# Altium PCB PCB.PcbDoc
Units mm, origin at the board's own origin, x right, y up, seen from the top; angles counter-clockwise.
Board outline 119.38 x 63.37 mm, 2 copper layers (Top Layer, Bottom Layer); 34 components, 32 nets, 125 pads, 5 vias.
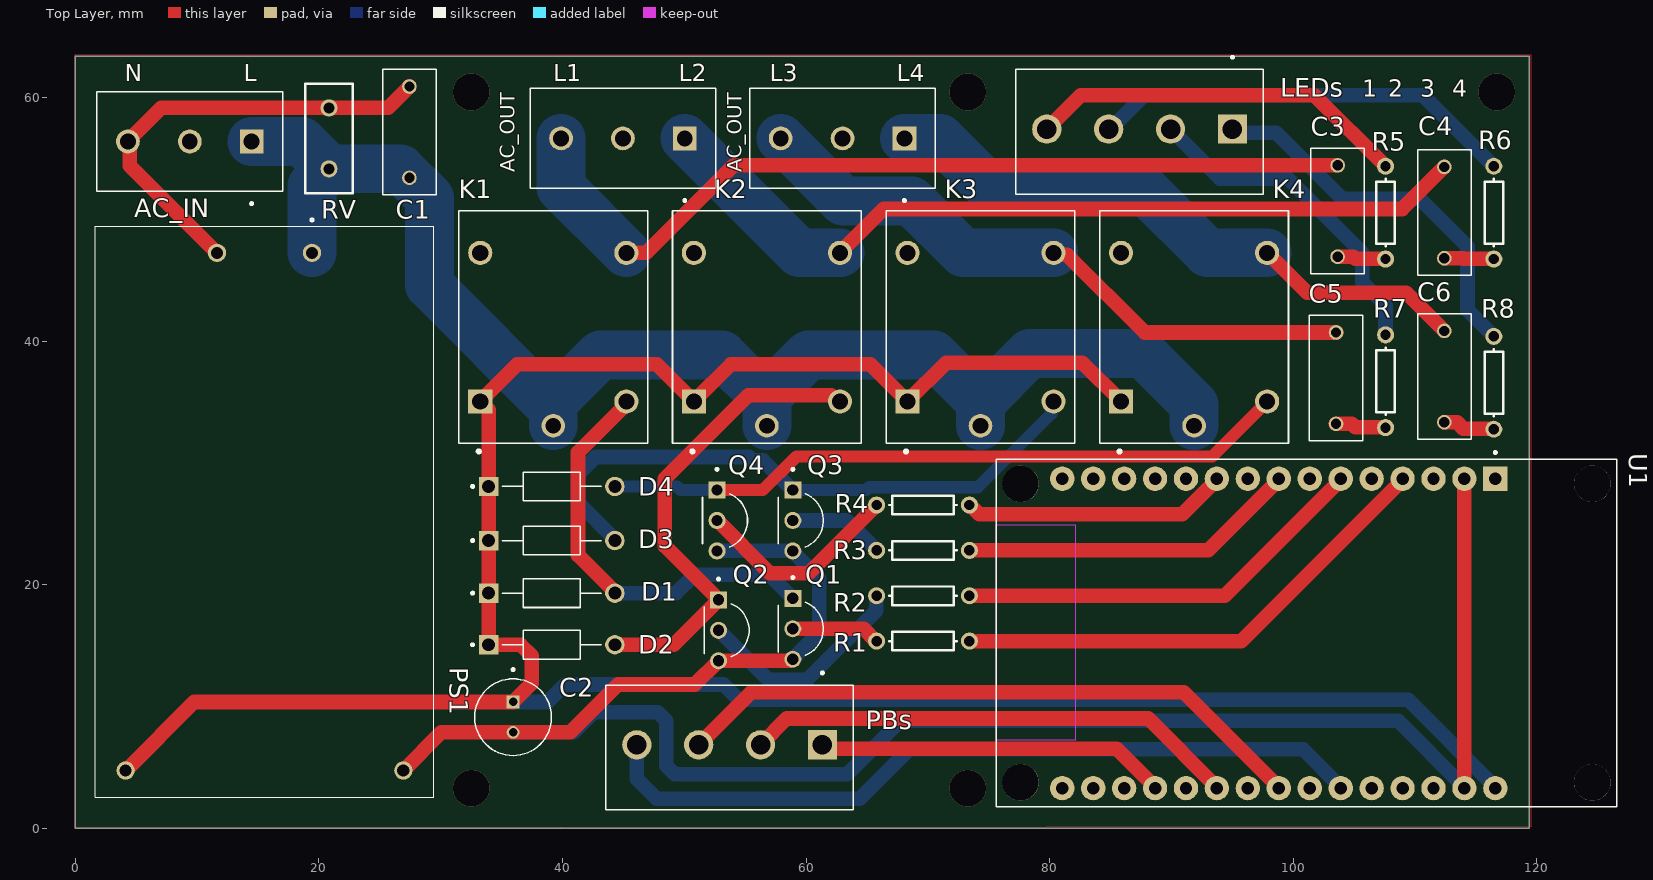
[diagram p0: Top Layer view]
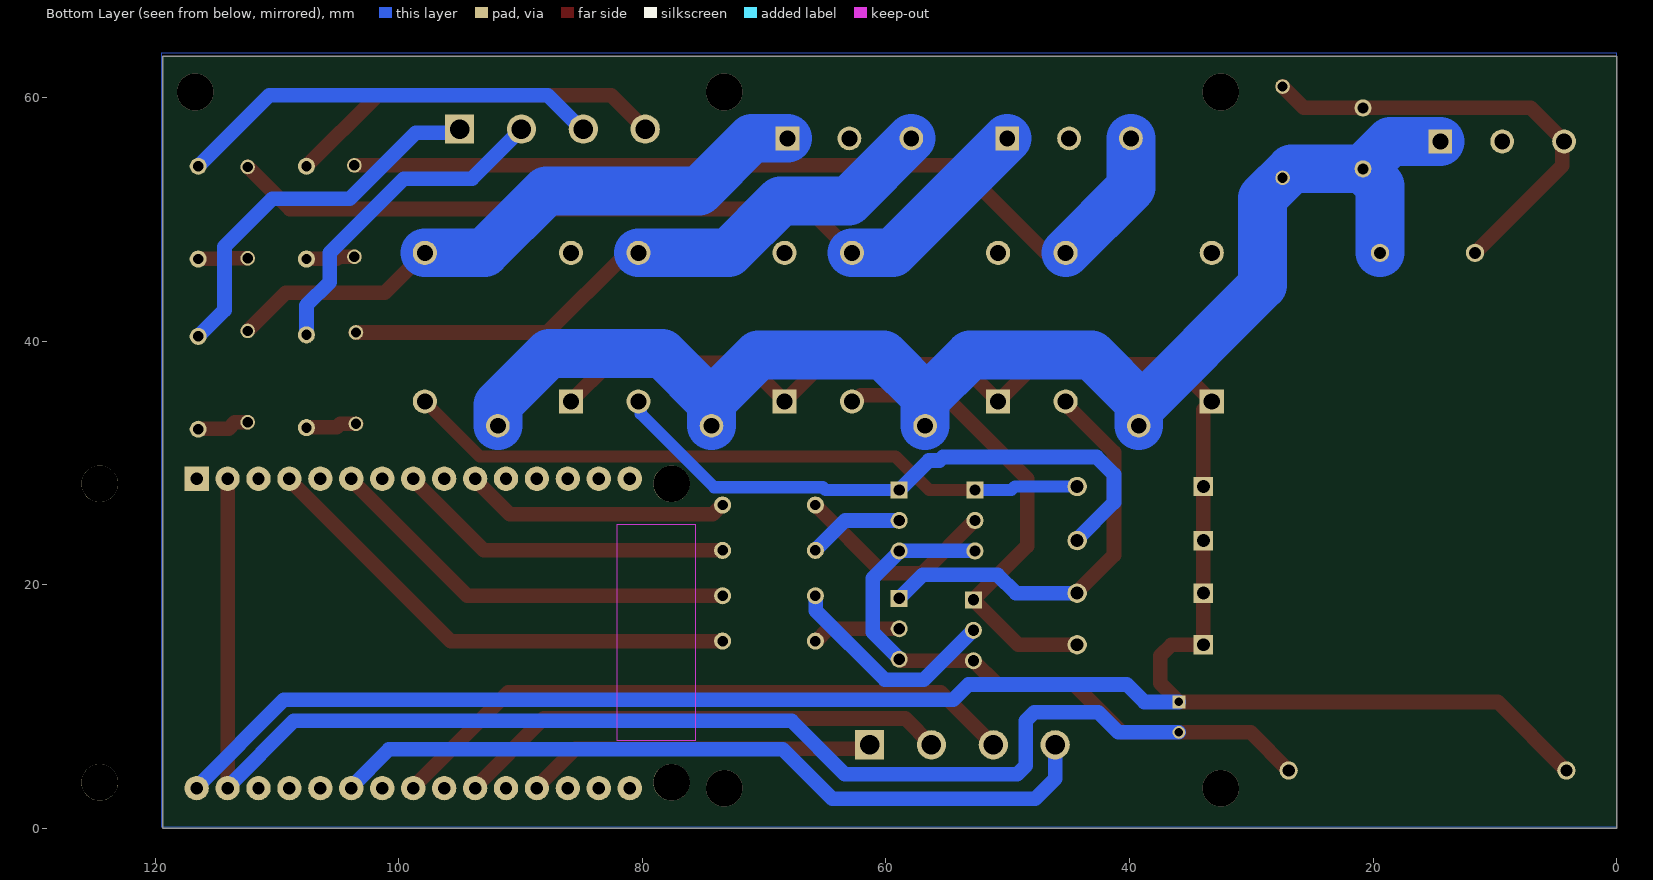
[diagram p1: Bottom Layer view, seen from below]

## Layer stack, top to bottom
Top Solder: solder mask 0.0102, Solder Resist, Dk 3.5
Top Layer: signal copper 0.0356
Dielectric 1: dielectric 0.32, FR-4, Dk 4.8
Bottom Layer: signal copper 0.0356
Bottom Solder: solder mask 0.0102, Solder Resist, Dk 3.5

## Board outline
0,0 119.38,0 119.38,63.373 0,63.373

## Design rules (kind name [scope] priority, off if disabled: settings)
Clearance Clearance_1 [InNamedPolygon('NONET_L02_P000') or InNamedPolygon('NONET_L01_P001')] p1: gap=0.254 ignorepadtopadclearanceinfootprint=FALSE except(0: Arc-Hole Track-Hole SMDPad-Hole THPad-Hole Via-Hole Fill-Hole Poly-Hole Region-Hole Text-Hole; 0.1: Via-Fill Via-Poly Via-Region; 1: Arc-Fill Arc-Poly Arc-Region Track-Fill Track-Poly Track-Region; 1.5: SMDPad-Fill SMDPad-Poly SMDPad-Region THPad-Fill THPad-Poly THPad-Region; 2: Fill-Fill Fill-Poly Fill-Region Poly-Poly Poly-Region Region-Region)
Clearance [All] p2: gap=0.254 ignorepadtopadclearanceinfootprint=FALSE except(0: Arc-Hole Track-Hole SMDPad-Hole THPad-Hole Via-Hole Fill-Hole Poly-Hole Region-Hole Text-Hole)
PolygonConnect [All] p1: connectstyle=Relief reliefconductorwidth=0.254 reliefentries=4 polygonreliefangle="90 Angle" airgapwidth=0.254
RoutingVias [All] p1: holewidth=0.711 width=1.27 viastyle="Through Hole" minholewidth=0.711 minwidth=1.27 maxholewidth=0.711 maxwidth=1.27
SolderMaskExpansion [All] p1: expansion=0.102 istentingtop=FALSE
Width Width_1 [InNet('AC_L') or InNet('AC_OUT_1') or InNet('AC_OUT_2') or InNet('AC_OUT_2') or InNet('AC_OUT_3') or InNet('AC_OUT_4')] p1: maxlimit=7 minlimit=1.2 preferedwidth=5
Width [All] p2: maxlimit=1.2 minlimit=0.8 preferedwidth=1
30 further rules are at their usual default settings.

## Classes and differential pairs
component class "main schem": AC_IN AC_OUT C1 C2 C3 C4 C5 C6 D1 D2 D3 D4 K1 K2 K4 LEDs PBs PS1 Q1 Q2 Q3 Q4 R1 R2 R3 R4 R5 R6 R7 R8 RV U1

## Components (designator, comment, footprint, x,y, rotation, side; value= is the part's Value field where it differs from the comment)
AC_IN "TB006-508-03BE" CUI_TB006-508-03BE 14.478,56.388 r180 top
AC_OUT "TB006-508-03BE" CUI_TB006-508-03BE 68.072,56.642 r180 top (schematic designator AC_L_OUT_2)
AC_OUT "TB006-508-03BE" CUI_TB006-508-03BE 50.038,56.642 r180 top (schematic designator AC_L_OUT_1)
C1 "ECQE4123KFW" CAPRR750W60L1030T440H1250 27.432,57.15 r90 top
C2 "25YXG220MEFC6.3X11" CAPPRD250W50D630H1250 35.941,9.124 r270 top
C3 "ECQE4123KFW" CAPRR750W60L1030T440H1250 103.632,50.673 r90 top
C4 "ECQE4123KFW" CAPRR750W60L1030T440H1250 112.395,50.546 r90 top
C5 "ECQE4123KFW" CAPRR750W60L1030T440H1250 103.505,36.957 r90 top
C6 "ECQE4123KFW" CAPRR750W60L1030T440H1250 112.395,37.084 r90 top
D1 "1N5818G" DIOAD1036W78L470D235 39.116,19.304 r0 top
D2 "1N5818G" DIOAD1036W78L470D235 39.116,15.071 r0 top
D3 "1N5818G" DIOAD1036W78L470D235 39.116,23.622 r0 top
D4 "1N5818G" DIOAD1036W78L470D235 39.116,28.067 r0 top
K1 "SRD-05VDC-SL-C" RELAY_SRD-05VDC-SL-C 39.243,41.148 r90 top
K2 "SRD-05VDC-SL-C" RELAY_SRD-05VDC-SL-C 56.779,41.148 r90 top
K3 "SRD-05VDC-SL-C" RELAY_SRD-05VDC-SL-C 74.316,41.148 r90 top
K4 "SRD-05VDC-SL-C" RELAY_SRD-05VDC-SL-C 91.852,41.148 r90 top
LEDs "TB007-508-04BE" CUI_TB007-508-04BE 94.996,57.404 r180 top
PBs "TB007-508-04BE" CUI_TB007-508-04BE 61.341,6.858 r180 top
PS1 "HLK-10M05" HLK10M05 19.431,47.244 r270 top
Q1 "BC337" TO92250P510H770-3 59.563,16.383 r270 top
Q2 "BC337" TO92250P510H770-3 53.467,16.256 r270 top
Q3 "BC337" TO92250P510H770-3 59.563,25.273 r270 top
Q4 "BC337" TO92250P510H770-3 53.34,25.273 r270 top
R1 "Res1" AXIAL-0.3 69.596,15.367 r180 top value=1K
R2 "Res1" AXIAL-0.3 69.596,19.092 r180 top value=1K
R3 "Res1" AXIAL-0.3 69.596,22.818 r180 top value=1K
R4 "Res1" AXIAL-0.3 69.596,26.543 r180 top value=1K
R5 "Res1" AXIAL-0.3 107.569,50.546 r90 top value=1K
R6 "Res1" AXIAL-0.3 116.459,50.546 r90 top value=1K
R7 "Res1" AXIAL-0.3 107.569,36.703 r90 top value=1K
R8 "Res1" AXIAL-0.3 116.459,36.576 r90 top value=1K
RV "MOV-07D470K" MOV-07DXXXK(3.9T) 20.828,56.642 r90 top
U1 "ESP32-DEVKIT-V1" ESP32-DEVKIT-V1 124.546,28.282 r270 top

## Footprints (in the part's own frame and the unit in brackets; to place one, negate y for a bottom-side part, rotate by r counter-clockwise, add the part's x,y. Pads: shape width x height; smd on the part's side, far side on the other; paste and mask are expansions set on the pad)
AXIAL-0.3 [mm] "Axial Device, Thru-Hole; 2 Leads; 0.3 in Pin Spacing"
  round 1.4 hole 0.85: 1(-3.81,0) 2(3.81,0)
  silkscreen extent -2.77,-0.76 2.77,0.76
CAPPRD250W50D630H1250 [mm]
  round 1.05 hole 0.7: N(1.25,0)
  rect 1.05x1.05 hole 0.7: P(-1.25,0)
  silkscreen extent -4,-3.15 3.15,3.15
CAPRR750W60L1030T440H1250 [mm]
  round 1.2 hole 0.85: 1(-3.75,0) 2(3.75,0)
  silkscreen extent -5.15,-2.2 5.15,2.2
CUI_TB006-508-03BE [mm]
  rect 1.95x1.95 / inner round 1.95 / far side rect 1.95x1.95 hole 1.3: 1(0,0)
  round 1.95 hole 1.3: 2(5.08,0) 3(10.16,0)
  silkscreen extent -2.54,-4.1 12.7,5.2, body extent -3.04,-4.1 12.7,4.1, height 10
CUI_TB007-508-04BE [mm]
  rect 2.4x2.4 / inner round 2.4 / far side rect 2.4x2.4 hole 1.6: 1(0,0)
  round 2.4 hole 1.6: 2(5.08,0) 3(10.16,0) 4(15.24,0)
  silkscreen extent -2.54,-6 17.78,5.35
DIOAD1036W78L470D235 [mm]
  round 1.59 hole 1.06: A(5.18,0)
  rect 1.59x1.59 / inner round 1.59 / far side rect 1.59x1.59 hole 1.06: C(-5.18,0)
  silkscreen extent -6.6,-1.17 4.07,1.17, body extent -5.47,-1.35 5.47,1.35, height 2.69
ESP32-DEVKIT-V1 [mm]
  rect 2x2 / inner round 2 / far side rect 2x2 hole 1.02: 1(-0.42,-7.96)
  round 2 hole 1.02: 2(-0.42,-10.5) 3(-0.42,-13.04) 4(-0.42,-15.58) 5(-0.42,-18.12) 6(-0.42,-20.66) 7(-0.42,-23.2) 8(-0.42,-25.74) 9(-0.42,-28.28) 10(-0.42,-30.82) 11(-0.42,-33.36) 12(-0.42,-35.9) 13(-0.42,-38.44) 14(-0.42,-40.98) 15(-0.42,-43.52) 16(24.98,-43.52) 17(24.98,-40.98) 18(24.98,-38.44) 19(24.98,-35.9) 20(24.98,-33.36) 21(24.98,-30.82) 22(24.98,-28.28) 23(24.98,-25.74) 24(24.98,-23.2) 25(24.98,-20.66) 26(24.98,-18.12) 27(24.98,-15.58) 28(24.98,-13.04) 29(24.98,-10.5) 30(24.98,-7.96)
  round 3 hole 3 unplated: ""(0,0) ""(0,-46.95) ""(24.51,0) ""(24.51,-46.95)
  Keep-Out Layer region: 21.06,-48.95 3.37,-48.95 3.37,-42.46 21.06,-42.46
  silkscreen extent -2.67,-48.95 26.51,2
HLK10M05 [mm]
  round 1.5 hole 1: 1(0,0) 2(0,-7.8) 3(42.5,7.5) 4(42.5,-15.3)
  silkscreen extent -2.8,-17.8 44.7,10
MOV-07DXXXK(3.9T) [mm]
  round 1.4 hole 0.9: 1(-2.5,0) 2(2.5,0)
  silkscreen extent -4.5,-1.95 4.5,1.95
RELAY_SRD-05VDC-SL-C [mm]
  rect 1.98x1.98 / inner round 1.98 / far side rect 1.98x1.98 hole 1.32: A1(-6.1,6)
  round 1.98 hole 1.32: A2(-6.1,-6) NC(6.1,6) NO(6.1,-6)
  round 1.935 hole 1.29: COM(-8.1,0)
  silkscreen extent -10.3,-7.75 9.55,7.75, body extent -9.6,-7.8 9.6,7.8, height 15.8
TO92250P510H770-3 [mm]
  rect 1.4x1.4 hole 0.93: 1(-2.5,-0.655)
  round 1.4 hole 0.93: 2(0,-0.655) 3(2.5,-0.655)
  silkscreen extent -4.3,-1.85 2.18,1.85, body extent -2.73,-2.5 2.73,1.19, height 8.7

## Part data
AC_IN AC_OUT AC_OUT: "2~24 Poles, Screw Type, Horizontal, 5.08 Pitch, 26~14 (AWG), Terminal Block Connector", Package=None, Availability="In Stock", Check_prices=https://www.snapeda.com/parts/TB006-508-03BE/CUI+Devices/view-part/?ref=eda, CUI_purchase_URL=https://www.cuidevices.com/product/interconnect/connectors/terminal-blocks/tb006-508-series?utm_source=snapeda.com&utm_medium=referral&utm_campaign=snapedaBOM, MF="CUI Devices", MP=TB006-508-03BE, Price=None, Purchase-URL=https://pricing.snapeda.com/search/part/TB006-508-03BE/?ref=eda, SnapEDA_Link=https://www.snapeda.com/parts/TB006-508-03BE/CUI+Devices/view-part/?ref=snap
C1 C2 C3 C4 C5 C6: Package=None, Price=None
  C1 C3 C4 C5 C6: Availability=Unavailable, MP=ECQE4123KFW
  C2: Availability="In Stock", Check_prices=https://www.snapeda.com/parts/25YXG220MEFC6.3X11/Rubycon/view-part/?ref=eda, MF=Rubycon, MP=25YXG220MEFC6.3X11, SnapEDA_Link=https://www.snapeda.com/parts/25YXG220MEFC6.3X11/Rubycon/view-part/?ref=snap
D1 D2 D3 D4: "Diode Schottky 30 V 1A Through Hole Axial", Package="DO-41-2 ON Semiconductor", Availability="In Stock", Check_prices=https://www.snapeda.com/parts/1N5818G/Onsemi/view-part/?ref=eda, MF="ON Semiconductor", MP=1N5818G, Price=None, Purchase-URL=https://pricing.snapeda.com/search/part/1N5818G/?ref=eda, SnapEDA_Link=https://www.snapeda.com/parts/1N5818G/Onsemi/view-part/?ref=snap
K1 K2 K3 K4: "5V Trigger Relay Module For Arduino And Raspberry Pi 5V Trigger Relay Module For Arduino And Raspberry Pi", Package="NON STANDARD-5 Songle Relay", Availability="Not in stock", Check_prices=https://www.snapeda.com/parts/SRD-05VDC-SL-C/Songle+Relay/view-part/?ref=eda, MF="Songle Relay", MP=SRD-05VDC-SL-C, Price=None, SnapEDA_Link=https://www.snapeda.com/parts/SRD-05VDC-SL-C/Songle+Relay/view-part/?ref=snap
LEDs PBs: "2~24 Poles, Screw Type, Horizontal, 5.08 Pitch, 24~12 (AWG), Terminal Block Connector", Package=None, Availability="In Stock", Check_prices=https://www.snapeda.com/parts/TB007-508-04BE/CUI+Devices/view-part/?ref=eda, CUI_purchase_URL=https://www.cuidevices.com/product/interconnect/connectors/terminal-blocks/tb007-508-series?utm_source=snapeda.com&utm_medium=referral&utm_campaign=snapedaBOM, MF="CUI Devices", MP=TB007-508-04BE, Price=None, Purchase-URL=https://pricing.snapeda.com/search/part/TB007-508-04BE/?ref=eda, SnapEDA_Link=https://www.snapeda.com/parts/TB007-508-04BE/CUI+Devices/view-part/?ref=snap
PS1: "10W Ultra-Compact Power Module", Package=Package, Availability="Not in stock", Check_prices=https://www.snapeda.com/parts/HLK-10M05/Hi-link/view-part/?ref=eda, MF=Hi-link, MP=HLK-10M05, Price=None, SnapEDA_Link=https://www.snapeda.com/parts/HLK-10M05/Hi-link/view-part/?ref=snap
Q1 Q2 Q3 Q4: library part BC337-16_A1, "TO-92, 50V, 0.8A, NPN Bipolar Transistor", Package="TO-92 Taiwan Semiconductor", Availability="In Stock", Check_prices=https://www.snapeda.com/parts/BC337-16%20A1/Taiwan+Semiconductor/view-part/?ref=eda, MF="Taiwan Semiconductor", MP="BC337-16 A1", Price=None, Purchase-URL="https://pricing.snapeda.com/search/part/BC337-16 A1/?ref=eda", SnapEDA_Link=https://www.snapeda.com/parts/BC337-16%20A1/Taiwan+Semiconductor/view-part/?ref=snap
R1 R2 R3 R4 R5 R6 R7 R8: "Resistor", LatestRevisionDate=17-Jul-2002, LatestRevisionNote="Re-released for DXP Platform.", PackageDescription="Axial Device, Thru-Hole; 2 Leads; 0.3 in Pin Spacing", PackageReference=AXIAL-0.3, Published=8-Jun-2000, Publisher="Altium Limited"
RV: "47V 250A Varistor 1 Circuit Through Hole Disc 7mm", Package="Disc-7 Bourns", Availability=Unavailable, DigiKey-Purchase-URL=https://snapeda.com/shop?store=DigiKey&id=1301146, MF=Bourns, MP=MOV-07D470K, Price=None, SnapEDA_Link=https://www.snapeda.com/parts/MOV-07D470K/Bourns/view-part/1301146/?ref=snap
U1: "Dual core, Wi-Fi: 2.4 GHz up to 150 Mbits/s,BLE (Bluetooth Low Energy) and legacy Bluetooth, 32 bits, Up to 240 MHz"

## Via types
v1: diameter 3, hole 3, Top Layer to Bottom Layer, 5 vias

## Nets (pads, with @x,y where several pads share a name; then routed paths per layer and width w, separated by ;. In a path a pad name is that pad's centre, name@x,y a point inside that pad or via, vN(x,y) a via of type N, cw(c..) or ccw(c..) an arc to the next point about the centre after c; other vN are vias at no path point)
5Vdc: C2.P D1.C D2.C D3.C D4.C K1.A1 K2.A1 K3.A1 K4.A1 PS1.4 U1.30 | length 208.1
  Top Layer w1.2: PS1.4 9.761,10.374 C2.P 37.465,11.898 37.465,14.156 36.55,15.071 D2.C D1.C D3.C D4.C 33.936,34.355 K1.A1 36.295,38.1 47.727,38.1 K2.A1 53.831,38.1 65.264,38.1 K3.A1 71.495,38.227 82.673,38.227 K4.A1 ; U1.30 U1.30@116.586,3.518
  Bottom Layer w1.2: C2.P 38.779,10.374 40.215,11.811 53.213,11.811 54.483,10.541 109.429,10.541 116.586,3.384 U1.30
AC_L: AC_IN.1 C1.1 K1.COM K2.COM K3.COM K4.COM PS1.1 RV.1 | length 115.8
  Bottom Layer w4: AC_IN.1 18.582,56.388 RV.1 ; PS1.1 19.431,52.745 RV.1 ; K1.COM 39.243,34.417 ; K2.COM 56.779,35.169 ; K3.COM 74.316,34.946 ; K4.COM 91.852,34.767 87.63,38.989 78.359,38.989 74.316,34.946 ; RV.1 26.69,54.142 29.083,51.749 29.083,44.577 39.243,34.417 ; 39.243,34.417 39.243,34.995 43.11,38.862 53.086,38.862 56.779,35.169 ; 56.779,35.169 56.779,35.443 60.198,38.862 70.485,38.862 74.316,35.031 74.316,34.946
AC_N: AC_IN.3 C1.2 PS1.2 RV.2 | length 37.2
  Top Layer w1.2: PS1.2 4.462,54.413 4.462,56.244 AC_IN.3 7.072,59.142 RV.2 25.674,59.142 C1.2
AC_OUT_1: AC_OUT.3@39.878,56.642 C3.2 K1.NO | length 73
  Top Layer w1.2: K1.NO 46.867,47.248 54.042,54.423 C3.2
  Bottom Layer w4: AC_OUT.3@39.878,56.642 39.878,52.613 K1.NO
AC_OUT_2: AC_OUT.1@50.038,56.642 C4.2 K2.NO | length 69.2
  Top Layer w1.2: K2.NO 66.378,50.847 108.946,50.847 C4.2
  Bottom Layer w4: AC_OUT.1@50.038,56.642 59.432,47.248 K2.NO
AC_OUT_3: AC_OUT.3@57.912,56.642 C5.2 K3.NO | length 52.2
  Top Layer w1.2: K3.NO 80.465,47.099 81.414,47.099 87.805,40.707 C5.2
  Bottom Layer w4: AC_OUT.3@57.912,56.642 63.052,51.502 68.649,51.502 72.903,47.248 K3.NO
AC_OUT_4: AC_OUT.1@68.072,56.642 C6.2 K4.NO | length 50.9
  Top Layer w1.2: K4.NO 101.134,43.966 109.263,43.966 C6.2
  Bottom Layer w4: AC_OUT.1@68.072,56.642 71.018,56.642 75.336,52.324 87.884,52.324 92.96,47.248 K4.NO
GND: C2.N PS1.3 Q1.3 Q2.3 Q3.3 Q4.3 U1.2 U1.29 | length 165.5
  Top Layer w1.2: PS1.3 30.061,7.874 C2.N 40.64,7.874 44.577,11.811 50.867,11.811 Q2.3 58.727,13.756 58.854,13.883 Q1.3 Q1.3@58.962,13.883 ; U1.29 U1.2
  Bottom Layer w1.2: C2.N 40.927,7.874 42.578,9.525 47.811,9.525 48.514,8.822 48.514,5.148 49.217,4.445 63.373,4.445 67.748,8.82 108.61,8.82 114.046,3.384 U1.29 ; Q4.3 Q3.3 58.908,22.719 61.087,20.54 61.087,16.116 58.908,13.937 Q1.3 ; U1.2@114.046,28.486 U1.2
NetC3_1: C3.1 R5.1 | length 4
  Top Layer w1.2: C3.1 104.928,46.923 105.077,46.774 107.531,46.774 R5.1
NetC4_1: C4.1 R6.1 | length 4.1
  Top Layer w1.2: C4.1 113.945,46.796 113.967,46.774 116.421,46.774 R6.1
NetC5_1: C5.1 R7.1 | length 4.2
  Top Layer w1.2: C5.1 104.801,33.207 105.077,32.931 107.531,32.931 R7.1
NetC6_1: C6.1 R8.1 | length 4.3
  Top Layer w1.2: C6.1 113.437,33.334 113.967,32.804 116.421,32.804 R8.1
NetD1_A: D1.A K1.A2 Q1.1 | length 34.7
  Top Layer w1.2: D1.A 44.296,19.41 41.275,22.431 41.275,30.861 44.853,34.439 44.853,34.447 45.243,34.837 K1.A2
  Bottom Layer w1.2: D1.A 49.315,19.304 50.839,20.828 56.963,20.828 Q1.1
NetD2_A: D2.A K2.A2 Q2.1 | length 39.3
  Top Layer w1.2: D2.A 49.127,15.071 Q2.1 48.387,23.181 48.387,28.702 55.245,35.56 62.056,35.56 62.568,35.048 K2.A2
NetD3_A: D3.A K3.A2 Q3.1 | length 51
  Bottom Layer w1: Q3.1 64.96,27.773 65.184,27.997 74.098,27.997 80.128,34.027 80.128,34.86 K3.A2
  Bottom Layer w1.2: D3.A 44.296,23.728 41.275,26.749 41.275,29.083 42.672,30.48 55.311,30.48 55.597,30.194 56.487,30.194 Q3.1
NetD4_A: D4.A K4.A2 Q4.1 | length 56.7
  Top Layer w1: Q4.1 56.442,27.773 59.205,30.536 93.34,30.536 K4.A2
  Bottom Layer w1: D4.A 49.403,28.067 49.697,27.773 Q4.1
NetLEDs_1: LEDs.1 R8.2 | length 31.6
  Bottom Layer w1.2: LEDs.1 95.307,57.093 98.609,57.093 104.013,51.689 110.363,51.689 114.3,47.752 114.3,42.545 R8.2
NetLEDs_2: LEDs.2 R7.2 | length 27.5
  Bottom Layer w1.2: LEDs.2 93.98,53.34 99.568,53.34 105.664,47.244 105.664,44.831 107.569,42.926 R7.2
NetLEDs_3: LEDs.3 R6.2 | length 35.2
  Bottom Layer w1.2: LEDs.3 84.971,57.404 87.765,60.198 110.617,60.198 R6.2
NetLEDs_4: LEDs.4 R5.2 | length 31.4
  Top Layer w1.2: LEDs.4 82.55,60.198 101.727,60.198 R5.2
NetQ1_2: Q1.2 R1.2 | length 7.3
  Top Layer w1.2: Q1.2 64.716,16.383 65.732,15.367 R1.2
NetQ2_2: Q2.2 R2.2 | length 18.3
  Top Layer w1.2: Q2.2 Q2.2@52.85,16.294
  Bottom Layer w1.2: Q2.2 56.876,12.192 60.071,12.192 65.748,17.869 65.748,19.054 R2.2
NetQ3_2: Q3.2 R3.2 | length 7.9
  Bottom Layer w1.2: Q3.2 63.331,25.273 R3.2
NetQ4_2: Q4.2 R4.2 | length 17.2
  Top Layer w1.2: Q4.2 57.003,20.955 60.198,20.955 R4.2
PB1: PBs.1 U1.19 | length 28.8
  Top Layer w1.2: PBs.1 61.652,6.547 85.483,6.547 88.646,3.384 U1.19
PB2: PBs.2 U1.21 | length 41
  Top Layer w1.2: PBs.2 58.42,9.017 88.093,9.017 93.726,3.384 U1.21
  Bottom Layer w1.4: PBs.2 PBs.2@56.515,6.858
PB3: PBs.3 U1.23 | length 52.7
  Top Layer w1.2: PBs.3 55.499,11.176 91.014,11.176 98.806,3.384 U1.23
PB4: PBs.4 U1.25 | length 64.3
  Bottom Layer w1.2: PBs.4 46.101,4.064 47.752,2.413 64.389,2.413 68.453,6.477 100.793,6.477 103.886,3.384 U1.25
REL1: R1.1 U1.4 | length 41.1
  Top Layer w1.2: R1.1 95.713,15.367 108.966,28.62 U1.4
REL2: R2.1 U1.6 | length 34.5
  Top Layer w1.2: R2.1 94.358,19.092 103.886,28.62 U1.6
REL3: R3.1 U1.8 | length 27.9
  Top Layer w1.2: R3.1 93.004,22.818 98.806,28.62 U1.8
REL4: R4.1 U1.10 | length 21.9
  Top Layer w1.2: R4.1 73.46,26.543 74.222,25.781 90.887,25.781 93.726,28.62 U1.10
pads on no net: AC_IN.2 AC_OUT.2 K1.NC K2.NC K3.NC K4.NC U1. U1.1 U1.3 U1.5 U1.7 U1.9 U1.11 U1.12 U1.13 U1.14 U1.15 U1.16 U1.17 U1.18 U1.20 U1.22 U1.24 U1.26 U1.27 U1.28
copper on no net:
  other v1: 32.512,3.302 73.279,3.302 32.512,60.452 73.279,60.452 116.713,60.452

## Polygon pours and split planes (outlines as drawn)
no net on Bottom Layer "NONET_L02_P000" (solid, shelved, pour order 0): 0,0.127 0,63.627 119.507,63.627 119.507,0.127
no net on Top Layer "NONET_L01_P001" (solid, shelved, pour order 1): 0,0 0,63.5 119.507,63.5 119.507,0.127

## Silkscreen, mask and mechanical layers (free items; w line width, h text height)
Top Overlay:
  text "N" at 4.064,61.341 h1.4
  text "L" at 13.843,61.341 h1.4
  text "L1" at 39.243,61.341 h1.4
  text "L2" at 49.53,61.341 h1.4
  text "L3" at 57.023,61.341 h1.4
  text "L4" at 67.437,61.341 h1.4
  text "1" at 105.664,60.071 h1.4
  text "2" at 107.808,60.071 h1.4
  text "3" at 110.419,60.071 h1.4
  text "4" at 113.03,60.071 h1.4